# Altium PCB PCB1.PcbDoc (part 3 of 3)
Units mm, origin at the board's own origin, x right, y up, seen from the top; angles counter-clockwise.
Board outline 100.25 x 100.25 mm, 2 copper layers (Top Layer, Bottom Layer); 97 components, 80 nets, 311 pads, 309 vias.
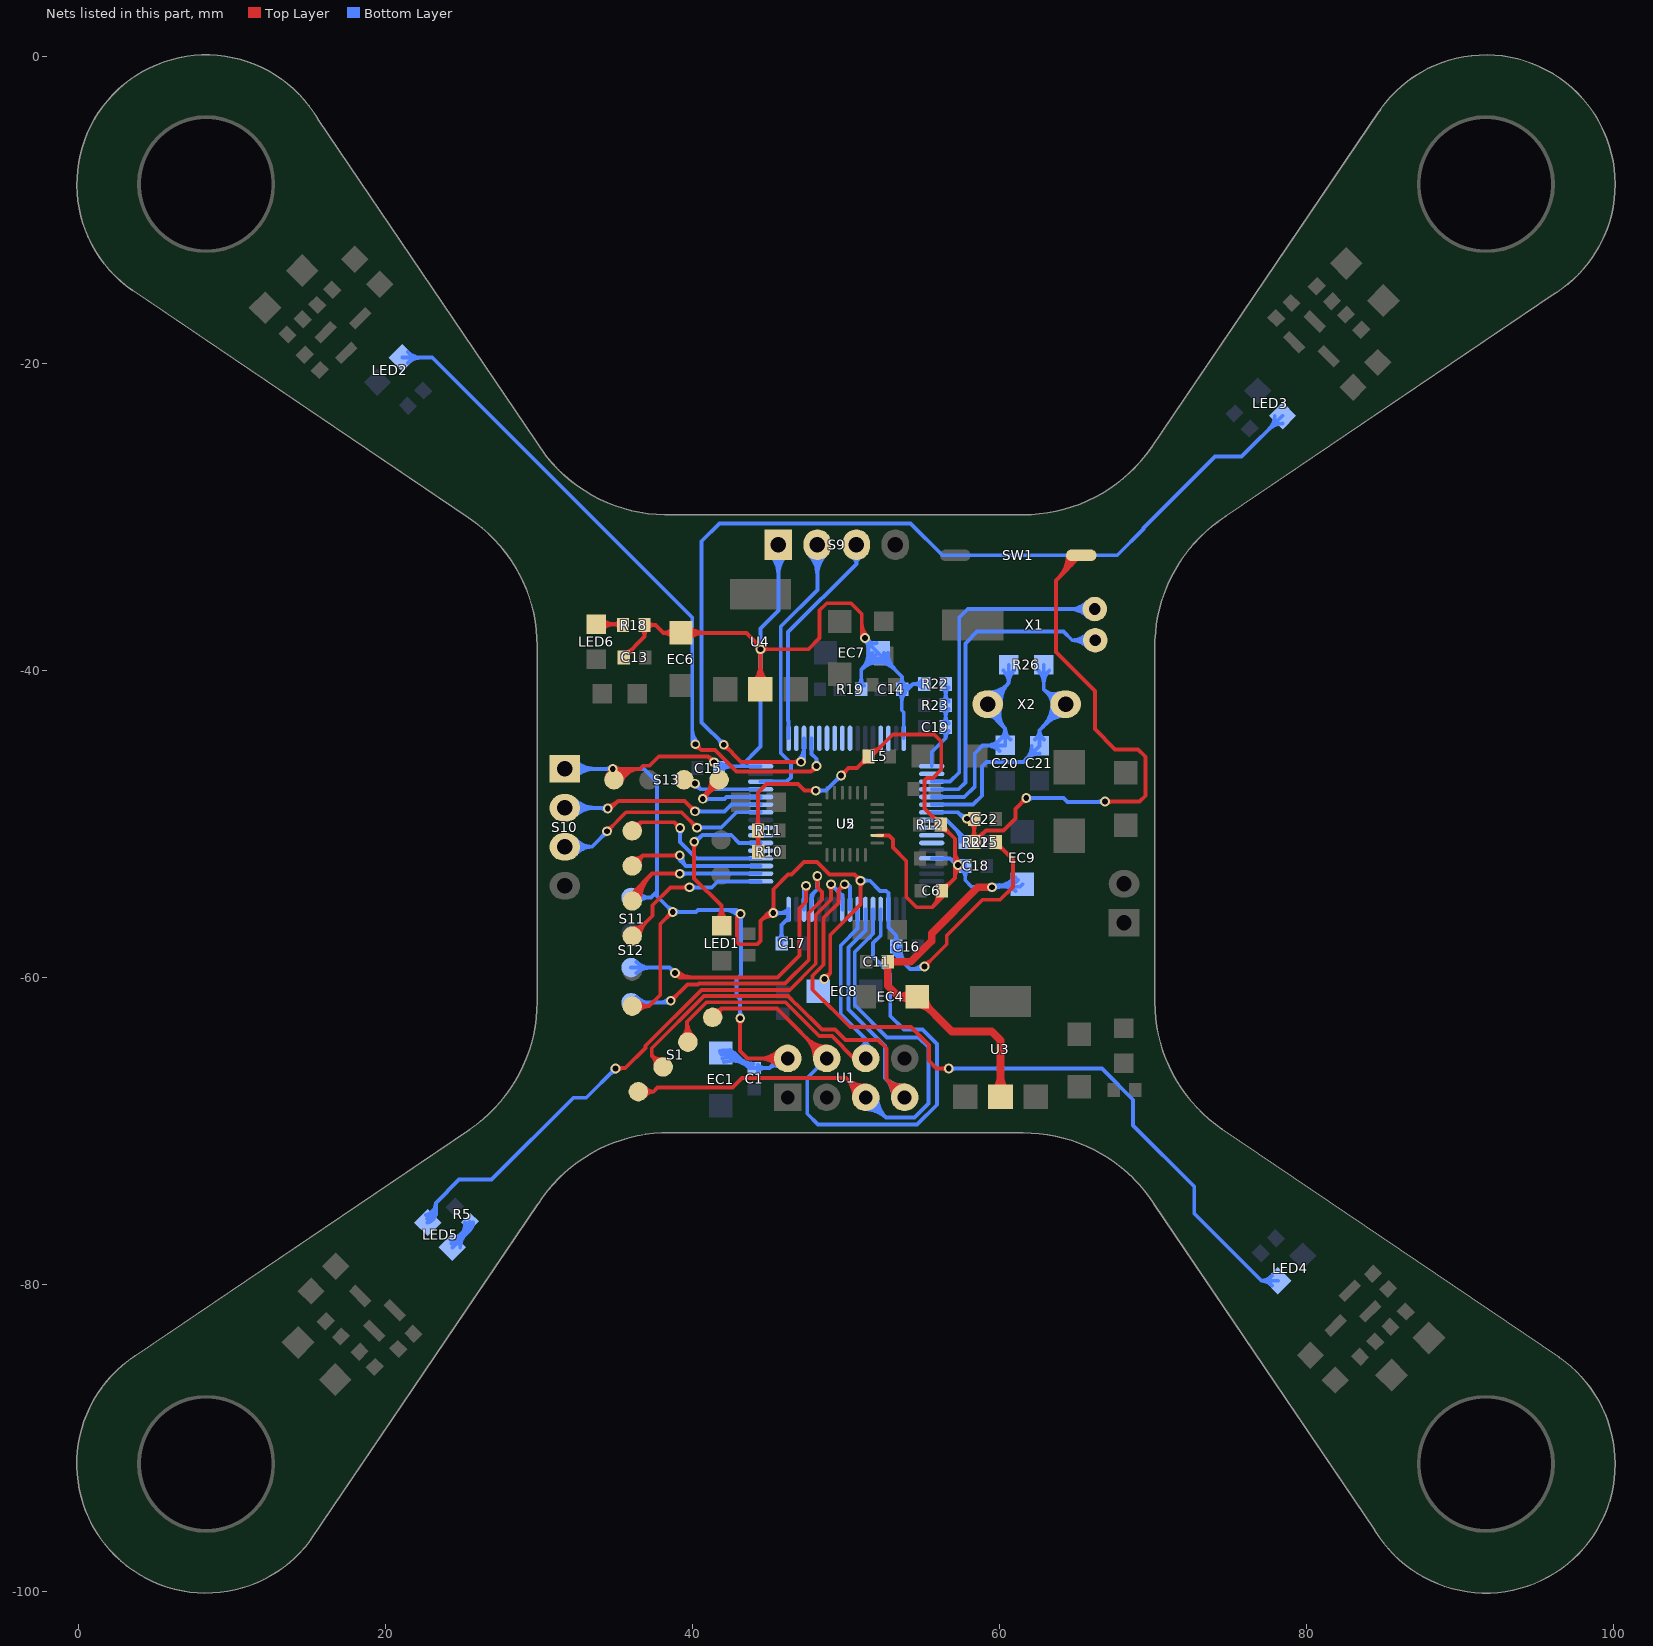
[diagram p3: the nets of this part, all layers, seen from the top]

## Via types
v1: diameter 0.635, hole 0.381, Top Layer to Bottom Layer, 309 vias

## Nets (pads, with @x,y where several pads share a name; then routed paths per layer and width w, separated by ;. In a path a pad name is that pad's centre, name@x,y a point inside that pad or via, vN(x,y) a via of type N, cw(c..) or ccw(c..) an arc to the next point about the centre after c; other vN are vias at no path point) (continued)
NetLED5_2: LED5.2 R5.1 | length 9.7
  Bottom Layer w0.254: LED5.2@24.229,-77.097 ccw(c23.887,-75.686) 25.145,-76.412 ; LED5.2@24.289,-77.344 ccw(c24.08,-76.481) 24.848,-76.925 ; LED5.2@24.348,-77.591 R5.1@25.489,-76.45 ; LED5.2@24.348,-77.083 ccw(c24.348,-75.856) 25.216,-76.724 ccw(c26.083,-77.591) LED5.2@24.856,-77.591 ; LED5.2@24.622,-77.317 ccw(c23.273,-75.968) R5.1@25.181,-75.968 ; LED5.2@24.839,-77.459 cw(c25.693,-77.23) 24.927,-76.788 ; 25.056,-76.884 ccw(c24.14,-75.968) R5.1@25.435,-75.968 ; R5.1@25.489,-75.933 R5.1@25.489,-76.45 ; R5.1@25.689,-75.968 cw(c25.007,-75.968) R5.1@25.489,-76.45
NetLED6_1: LED6.1 R18.2 | length 4.7
  Top Layer w0.254: LED6.1@33.708,-36.983 35.421,-36.983 R18.2@35.472,-37.033 ; LED6.1@34.067,-37.342 cw(c34.934,-38.209) 34.934,-36.983 cw(c34.934,-35.756) LED6.1@34.067,-36.623 ; 34.811,-36.983 cw(c34.811,-37.644) R18.2@35.279,-37.176 ; 34.814,-36.983 ccw(c34.814,-36.326) R18.2@35.279,-36.79
PA04: S1.1 U1.4 U5.20 | length 43.6
  Top Layer w0.254: S1.1@41.312,-62.599 41.885,-62.027 ; S1.1@41.479,-62.12 ccw(c41.608,-61.75) 41.885,-62.027 ; S1.1@41.792,-62.432 cw(c42.161,-62.303) 41.885,-62.027 ; U1.4@47.97,-65.278 ccw(c46.103,-65.278) 47.423,-63.958 ccw(c48.743,-62.639) U1.4@48.743,-64.505 ; U1.4@48.224,-65.278 ccw(c46.971,-65.278) 47.857,-64.392 ccw(c48.743,-63.506) U1.4@48.743,-64.759 ; U1.4@48.743,-65.278 45.491,-62.027 41.885,-62.027
  Bottom Layer w0.254: U1.4@48.743,-65.278 47.473,-66.548 47.473,-68.885 48.181,-69.594 54.638,-69.594 55.931,-68.301 55.931,-64.338 54.991,-63.398 53.772,-63.398 52.883,-62.509 52.883,-59.766 51.765,-58.649 51.765,-57.76 52.263,-57.262 U5.20@52.263,-55.562
PA05: S1.4 U1.5 U5.21 | length 48
  Top Layer w0.254: S1.4@36.463,-67.449 37.453,-67.449 ; S1.4@36.875,-67.745 cw(c37.453,-68.16) 37.453,-67.449 ; S1.4@36.875,-67.152 ccw(c37.453,-66.737) 37.453,-67.449 ; U1.5@50.51,-67.797 ccw(c48.811,-67.75) 50.013,-66.548 ; U1.5@50.764,-67.804 ccw(c49.623,-67.772) 50.43,-66.965 ccw(c51.237,-66.158) U1.5@51.268,-67.299 ; U1.5@51.261,-67.045 cw(c51.215,-65.346) 50.013,-66.548 ; U1.5@51.283,-67.818 50.013,-66.548 ; 37.453,-67.449 37.719,-67.183 42.596,-67.183 43.231,-66.548 50.013,-66.548
  Bottom Layer w0.254: U1.5@51.283,-68.591 cw(c51.283,-70.457) 52.602,-69.138 cw(c53.922,-67.818) U1.5@52.056,-67.818 ; U1.5@51.283,-68.337 cw(c51.283,-69.59) 52.169,-68.704 cw(c53.055,-67.818) U1.5@51.802,-67.818 ; U1.5@51.283,-67.818 52.603,-69.139 54.458,-69.139 55.372,-68.224 55.372,-64.541 54.737,-63.906 52.68,-63.906 50.571,-61.798 50.571,-58.344 51.763,-57.153 U5.21@51.763,-55.562
PA06: S1.3 U1.7 U5.22 | length 48.2
  Top Layer w0.254: S1.3@37.575,-65.773 ccw(c36.753,-65.676) 37.338,-65.091 ; S1.3@38.02,-65.328 cw(c37.923,-64.506) 37.338,-65.091 ; S1.3@38.079,-65.832 37.338,-65.091 ; U1.7@53.052,-67.761 ccw(c51.599,-67.655) 52.629,-66.624 ; U1.7@53.305,-67.78 ccw(c52.329,-67.708) 53.021,-67.017 ccw(c53.713,-66.325) U1.7@53.785,-67.3 ; U1.7@53.492,-67.818 U1.7@53.823,-67.818 52.629,-66.624 ; U1.7@53.766,-67.047 cw(c53.659,-65.594) 52.629,-66.624 ; 37.338,-65.091 37.338,-64.618 40.742,-61.214 46.219,-61.214 46.752,-61.747 46.787,-61.747 48.438,-63.398 49.285,-63.398 49.971,-64.084 52.095,-64.084 52.629,-64.618 52.629,-66.624
  Bottom Layer w0.254: U5.22@51.263,-55.562 51.263,-56.941 50.165,-58.039 50.165,-62.078 52.553,-64.465 52.553,-66.548 ; U1.7@53.05,-67.797 ccw(c51.351,-67.75) 52.553,-66.548 ; U1.7@53.304,-67.804 ccw(c52.163,-67.772) 52.97,-66.965 ccw(c53.777,-66.158) U1.7@53.808,-67.299 ; U1.7@53.801,-67.045 cw(c53.755,-65.346) 52.553,-66.548 ; U1.7@53.823,-67.818 52.553,-66.548
PA07: S1.2 U1.6 U5.23 | length 29.8
  Top Layer w0.254: S1.2@39.336,-63.857 ccw(c38.592,-63.112) 39.645,-63.112 ; 39.645,-63.49 ccw(c40.406,-63.49) S1.2@39.873,-64.034 ; 39.645,-62.886 ccw(c40.999,-62.886) S1.2@40.051,-63.853 ; S1.2@39.696,-64.216 39.645,-64.165 39.645,-62.886 40.91,-61.62 46.05,-61.62 48.255,-63.825 49.078,-63.825 50.53,-65.278 U1.6@51.283,-65.278
  Bottom Layer w0.254: U5.23@50.763,-55.562 50.763,-56.806 49.657,-57.912 49.657,-62.382 51.283,-64.008 ; U1.6@50.928,-64.591 ccw(c50.626,-64.008) 51.283,-64.008 ; U1.6@51.283,-65.278 51.283,-64.008 ; U1.6@51.638,-64.591 cw(c51.939,-64.008) 51.283,-64.008
PA09: S10.3 U5.42 | length 21.6
  Top Layer w0.254: v1(34.43,-50.47) 34.442,-50.47 35.675,-49.237 39.28,-49.237 v1(40.284,-50.241) ; v1@34.43,-50.279 ccw(c34.43,-49.789) 34.777,-50.136 ; v1@34.62,-50.47 cw(c35.049,-50.47) 34.746,-50.166 ; v1@40.094,-50.241 ccw(c39.634,-50.241) 39.959,-49.916 ccw(c40.284,-49.591) v1@40.284,-50.051
  Bottom Layer w0.254: S10.3@31.674,-51.486 33.452,-51.486 ; S10.3@32.168,-51.823 cw(c32.9,-52.449) 32.9,-51.486 cw(c32.9,-50.523) S10.3@32.168,-51.149 ; S10.3@32.361,-51.988 cw(c33.452,-52.92) 33.452,-51.486 ; S10.3@32.361,-50.983 ccw(c33.452,-50.051) 33.452,-51.486 ; 34.078,-50.86 ccw(c33.687,-50.47) v1@34.239,-50.47 ; 34.17,-50.768 cw(c34.43,-51.028) v1@34.43,-50.66 ; v1(34.43,-50.47) 34.43,-50.508 33.452,-51.486 ; v1(40.284,-50.241) 41.871,-50.241 42.875,-49.237 U5.42@44.438,-49.237 U5.42@44.426,-49.225 ; v1@40.419,-50.376 cw(c40.744,-50.701) 40.744,-50.241 cw(c40.744,-49.781) v1@40.419,-50.106
PA10: S10.2 U5.43 | length 21.2
  Top Layer w0.254: v1(34.468,-48.997) 34.646,-48.997 35.154,-48.489 39.472,-48.489 v1(40.157,-49.174) ; v1@34.468,-48.806 ccw(c34.468,-47.917) 35.097,-48.546 ; v1@39.967,-49.174 ccw(c39.507,-49.174) 39.832,-48.849 ccw(c40.157,-48.524) v1@40.157,-48.984
  Bottom Layer w0.254: S10.2@31.674,-48.946 34.417,-48.946 v1(34.468,-48.997) ; S10.2@32.141,-49.313 cw(c33.027,-50.199) 33.027,-48.946 cw(c33.027,-47.693) S10.2@32.141,-48.579 ; S10.2@32.32,-49.492 cw(c33.64,-50.812) 33.64,-48.946 cw(c33.64,-47.08) S10.2@32.32,-48.399 ; 33.885,-48.946 cw(c33.885,-49.579) v1@34.333,-49.131 ; 34.131,-48.946 ccw(c34.131,-48.659) v1@34.333,-48.862 ; v1(40.157,-49.174) 42.088,-49.174 42.525,-48.737 U5.43@44.438,-48.737 ; v1@40.292,-49.309 cw(c40.617,-49.634) 40.617,-49.174 cw(c40.617,-48.714) v1@40.292,-49.04
PA11: S13.1 U5.44 | length 10.4
  Top Layer w0.254: v1@40.616,-48.178 ccw(c40.473,-47.644) 40.951,-47.92 ; v1(40.665,-48.362) 41.732,-47.295 S13.1@41.732,-47.117 ; v1@40.665,-48.171 ccw(c40.665,-47.711) 40.991,-48.036 ccw(c41.316,-48.362) v1@40.856,-48.362 ; v1@40.739,-48.288 ccw(c39.569,-47.117) S13.1@41.224,-47.117 ; v1@40.849,-48.312 cw(c41.204,-48.217) 40.886,-48.033 ; 41.169,-47.858 cw(c41.732,-48.422) S13.1@41.732,-47.625 ; 41.173,-47.854 ccw(c40.436,-47.117) S13.1@41.478,-47.117
  Bottom Layer w0.254: v1(40.665,-48.362) 42.088,-48.362 42.212,-48.237 U5.44@44.438,-48.237 ; v1@40.8,-48.496 cw(c41.125,-48.822) 41.125,-48.362 cw(c41.125,-47.902) v1@40.8,-48.227
PA12: S13.2 U5.45 | length 5.2
  Bottom Layer w0.254: v1@40.157,-47.562 cw(c40.157,-48.021) 40.483,-47.696 cw(c40.808,-47.371) v1@40.348,-47.371 ; v1(40.157,-47.371) 40.524,-47.737 U5.45@44.438,-47.737
PA13: S9.2 U5.46 | length 23.6
  Bottom Layer w0.254: U5.46@44.438,-47.237 46.133,-47.237 46.406,-46.965 46.406,-46.082 46.368,-46.043 46.368,-45.987 45.745,-45.364 45.745,-37.135 48.133,-34.747 S9.2@48.133,-31.648 ; S9.2@47.586,-32.447 cw(c46.267,-33.767) 48.133,-33.767 cw(c49.999,-33.767) S9.2@48.68,-32.447 ; S9.2@47.766,-32.268 cw(c46.88,-33.154) 48.133,-33.154 cw(c49.386,-33.154) S9.2@48.5,-32.268
PA14: S9.3 U5.49 | length 15.7
  Bottom Layer w0.254: U5.49@46.263,-44.412 46.263,-43.299 46.22,-43.256 46.22,-37.498 50.673,-33.045 ; S9.3@50.384,-32.618 cw(c50.212,-33.045) 50.673,-33.045 ; S9.3@50.673,-31.648 50.673,-33.045 ; S9.3@50.962,-32.618 ccw(c51.134,-33.045) 50.673,-33.045
PA15: U5.50
PB03: U5.55
PB04: U5.56
PB05: U5.57
PB08: U5.61
PB09: U5.62
PB10: S12.1 U5.29 | length 26.5
  Top Layer w0.254: v1@38.506,-61.62 39.675,-60.452 40.354,-60.452 40.405,-60.401 46.025,-60.401 47.574,-58.852 47.574,-55.804 48.438,-54.94 48.438,-54.432 48.133,-54.127 v1(48.133,-53.391) ; v1@38.583,-61.328 ccw(c38.583,-60.807) 38.951,-61.176 ; v1@38.773,-61.519 cw(c39.172,-61.519) 38.89,-61.237 ; v1@47.998,-53.526 cw(c47.673,-53.851) 48.133,-53.851 cw(c48.593,-53.851) v1@48.268,-53.526
  Bottom Layer w0.254: S12.1@35.992,-61.646 38.456,-61.646 v1(38.583,-61.519) ; S12.1@36.351,-62.005 cw(c37.218,-62.872) 37.218,-61.646 cw(c37.218,-60.419) S12.1@36.351,-61.287 ; 37.816,-61.646 ccw(c37.816,-60.752) v1@38.448,-61.384 ; U5.29@47.763,-55.562 47.763,-54.625 48.133,-54.254 v1(48.133,-53.391) ; U5.29@47.786,-54.887 cw(c48.475,-54.887) 47.987,-54.4 ; v1@47.998,-53.526 cw(c47.673,-53.851) 48.133,-53.851 cw(c48.593,-53.851) v1@48.268,-53.526
PB11: S12.2 U5.30 | length 24.7
  Top Layer w0.254: v1@38.817,-59.76 ccw(c39.383,-59.194) 39.383,-59.995 ; v1(38.862,-59.715) 39.141,-59.995 ; v1@38.884,-59.905 cw(c38.919,-60.217) 39.141,-59.995 ; v1@38.997,-59.581 ccw(c39.996,-58.581) 39.996,-59.995 ; v1@39.051,-59.737 ccw(c39.364,-59.772) 39.141,-59.995 ; v1@47.262,-54.161 cw(c46.936,-54.486) 47.396,-54.486 cw(c47.856,-54.486) v1@47.531,-54.161 ; v1(47.396,-54.026) 47.396,-55.067 46.965,-55.499 46.965,-58.572 45.542,-59.995 39.141,-59.995
  Bottom Layer w0.254: S12.2@35.992,-59.36 38.506,-59.36 v1@38.887,-59.741 ; S12.2@36.351,-59.719 cw(c37.218,-60.586) 37.218,-59.36 cw(c37.218,-58.133) S12.2@36.351,-59.001 ; v1@38.672,-59.715 ccw(c38.212,-59.715) 38.537,-59.39 ccw(c38.862,-59.065) v1@38.862,-59.525 ; U5.30@47.263,-55.562 47.263,-54.16 v1(47.396,-54.026) v1@47.473,-53.95 ; U5.30@47.263,-54.809 cw(c48.179,-54.809) v1@47.531,-54.161
PB12: S11.4 U5.33 | length 13.6
  Top Layer w0.254: S11.4@36.068,-57.302 37.389,-55.982 37.389,-55.296 38.557,-54.127 v1(39.802,-54.127) ; S11.4@36.068,-56.794 ccw(c36.068,-55.568) 36.935,-56.435 ccw(c37.802,-57.302) S11.4@36.576,-57.302 ; v1@39.667,-54.262 ccw(c39.342,-54.587) 39.342,-54.127 ccw(c39.342,-53.667) v1@39.667,-53.993
  Bottom Layer w0.254: v1(39.802,-54.127) 41.25,-54.127 41.64,-53.737 U5.33@44.438,-53.737 ; v1@39.937,-54.262 cw(c40.262,-54.587) 40.262,-54.127 cw(c40.262,-53.667) v1@39.937,-53.993
PB13: S11.3 U5.34 | length 15
  Top Layer w0.254: S11.3@36.322,-55.016 cw(c38.1,-55.016) 36.843,-53.759 ; 36.409,-54.193 ccw(c37.233,-55.016) S11.3@36.068,-55.016 36.068,-54.534 37.363,-53.238 v1(39.167,-53.238) ; S11.3@36.576,-55.016 cw(c38.968,-55.016) 37.276,-53.325 ; v1@39.032,-53.373 ccw(c38.707,-53.698) 38.707,-53.238 ccw(c38.707,-52.778) v1@39.032,-53.104
  Bottom Layer w0.254: v1(39.167,-53.238) 39.928,-53.238 39.929,-53.237 U5.34@44.438,-53.237 ; v1@39.302,-53.373 cw(c39.627,-53.698) 39.627,-53.238 cw(c39.627,-52.778) v1@39.302,-53.104
PB14: S11.2 U5.35 | length 12.3
  Top Layer w0.254: S11.2@36.068,-52.73 36.754,-52.045 ; S11.2@36.159,-52.231 ccw(c36.279,-51.57) 36.754,-52.045 ; S11.2@36.568,-52.64 cw(c37.229,-52.52) 36.754,-52.045 ; v1@39.032,-52.179 ccw(c38.707,-52.505) 38.707,-52.045 ccw(c38.707,-51.585) v1@39.032,-51.91 ; v1(39.167,-52.045) 36.754,-52.045
  Bottom Layer w0.254: v1@39.104,-52.033 ccw(c39.506,-52.11) 39.217,-52.399 ; v1(39.167,-52.045) 39.167,-52.349 39.555,-52.737 ; v1@39.354,-52.081 ccw(c40.072,-52.22) 39.555,-52.737 ; U5.35@44.438,-52.737 39.555,-52.737
PB15: S11.1 U5.36 | length 12.4
  Top Layer w0.254: S11.1@36.068,-50.444 36.627,-49.886 ; S11.1@36.246,-49.968 ccw(c36.372,-49.631) 36.627,-49.886 ; S11.1@36.544,-50.267 cw(c36.882,-50.141) 36.627,-49.886 ; v1@39.002,-50.267 ccw(c38.542,-50.267) 38.867,-49.941 ccw(c39.192,-49.616) v1@39.192,-50.076 ; v1(39.192,-50.267) 38.811,-49.886 36.627,-49.886
  Bottom Layer w0.254: v1@39.057,-50.401 cw(c38.732,-50.727) 39.192,-50.727 cw(c39.652,-50.727) v1@39.327,-50.401 ; v1(39.192,-50.267) 39.192,-51.181 40.248,-52.237 U5.36@44.438,-52.237
PC00: R21.2 U5.8 | length 3.8
  Bottom Layer w0.254: U5.8@55.588,-49.737 56.544,-49.737 57.745,-50.938 R21.2@57.745,-51.181 ; 57.143,-50.336 cw(c56.348,-51.131) R21.2@57.472,-51.131
PC01: U5.9
PC02: U5.10
PC03: U5.11
PC04: LED4.1 U5.24 | length 54.6
  Top Layer w0.254: v1@49.721,-53.924 cw(c49.261,-53.924) 49.586,-54.249 cw(c49.911,-54.575) v1@49.911,-54.115 ; v1(49.911,-53.924) 49.505,-54.331 49.505,-55.143 48.539,-56.109 48.539,-59.176 47.822,-59.893 47.822,-60.802 49.022,-62.001 49.038,-62.001 50.279,-63.242 54.225,-63.242 55.397,-64.414 55.397,-65.43 55.905,-65.938 v1(56.693,-65.938) ; v1@56.558,-66.073 ccw(c56.233,-66.398) 56.233,-65.938 ccw(c56.233,-65.478) v1@56.558,-65.804
  Bottom Layer w0.254: v1@49.809,-53.95 49.936,-53.95 50.038,-53.848 50.263,-54.073 ; v1@50.038,-54.066 cw(c50.147,-54.188) 50.263,-54.073 ; U5.24@50.263,-55.562 50.263,-54.073 ; v1(56.693,-65.938) 66.675,-65.938 68.707,-67.97 68.707,-69.647 72.695,-73.635 72.695,-75.387 77.075,-79.767 ; v1@56.828,-66.073 cw(c57.153,-66.398) 57.153,-65.938 cw(c57.153,-65.478) v1@56.828,-65.804 ; LED4.1@77.758,-80.09 ccw(c77.075,-80.652) 77.075,-79.767 ; LED4.1@77.758,-79.444 cw(c77.075,-78.882) 77.075,-79.767 ; LED4.1@78.151,-79.767 77.075,-79.767
PC05: LED5.1 U5.25 | length 47
  Top Layer w0.254: v1@34.976,-65.913 35.611,-65.913 36.932,-64.592 36.932,-64.449 40.573,-60.808 46.333,-60.808 48.031,-59.109 48.031,-55.931 49.022,-54.94 v1(49.022,-53.924) ; v1@35.111,-66.073 cw(c35.497,-66.46) 35.497,-65.913 ; v1@35.111,-65.804 ccw(c35.374,-65.54) 35.374,-65.913 ; v1@48.887,-54.059 cw(c48.562,-54.384) 49.022,-54.384 cw(c49.482,-54.384) v1@49.157,-54.059
  Bottom Layer w0.254: LED5.1@22.632,-75.476 ccw(c22.476,-74.701) 23.266,-74.701 ; LED5.1@22.682,-75.725 ccw(c22.538,-75.012) 23.266,-75.012 ; 23.266,-75.322 cw(c22.601,-75.322) LED5.1@22.732,-75.974 23.266,-75.44 23.266,-74.701 ; v1@34.785,-65.938 cw(c34.325,-65.938) 34.651,-66.264 cw(c34.976,-66.589) v1@34.976,-66.129 ; v1(34.976,-65.938) 33.071,-67.843 32.233,-67.843 26.899,-73.177 24.79,-73.177 23.266,-74.701 ; v1@49.022,-54.115 cw(c49.022,-54.575) 49.347,-54.249 cw(c49.672,-53.924) v1@49.212,-53.924 ; v1(49.022,-53.924) 49.718,-54.62 ; 49.566,-54.468 cw(c49.147,-54.887) U5.25@49.74,-54.887 ; U5.25@49.743,-54.875 ccw(c49.575,-54.763) 49.718,-54.62 ; U5.25@49.763,-55.562 49.763,-54.62 49.718,-54.62
PC06: U5.37
PC07: LED1.1 U5.38 | length 14.2
  Top Layer w0.254: v1@39.972,-51.29 cw(c39.647,-51.616) 40.107,-51.616 cw(c40.567,-51.616) v1@40.241,-51.29 ; v1(40.107,-51.156) 40.107,-53.543 41.887,-55.323 LED1.1@41.887,-56.641 ; LED1.1@41.527,-56.282 ccw(c40.66,-55.415) 41.887,-55.415 ccw(c43.113,-55.415) LED1.1@42.246,-56.282
  Bottom Layer w0.254: v1(40.107,-51.156) 40.214,-51.156 40.646,-50.724 42.52,-50.724 43.033,-51.237 U5.38@44.438,-51.237 ; v1@40.107,-50.965 ccw(c40.107,-50.246) 40.615,-50.754
PC08: U5.39
PC09: U5.40
PC10: LED3.1 U5.51 | length 69.4
  Top Layer w0.254: v1@42.037,-45.022 cw(c42.037,-45.481) 42.362,-45.156 cw(c42.687,-44.831) v1@42.227,-44.831 ; v1(42.037,-44.831) 43.155,-45.949 v1(47.066,-45.949) ; v1@46.931,-46.083 ccw(c46.606,-46.409) 46.606,-45.949 ccw(c46.606,-45.489) v1@46.931,-45.814
  Bottom Layer w0.254: v1@41.846,-44.831 ccw(c41.387,-44.831) 41.712,-44.506 ccw(c42.037,-44.181) v1@42.037,-44.64 ; v1(42.037,-44.831) 40.589,-43.383 40.589,-31.572 41.758,-30.404 54.204,-30.404 56.286,-32.487 67.682,-32.487 69.393,-30.775 69.393,-30.709 74.041,-26.06 75.786,-26.06 LED3.1@78.452,-23.395 ; v1@46.931,-45.814 ccw(c46.132,-45.015) U5.51@47.263,-45.015 ; v1(47.066,-45.949) 47.263,-45.752 U5.51@47.263,-44.412 ; v1@47.111,-45.994 ccw(c46.745,-45.628) 47.263,-45.628 ; LED3.1@77.944,-23.395 cw(c76.718,-23.395) 77.585,-24.262 cw(c78.452,-25.129) LED3.1@78.452,-23.903
PC11: LED2.1 U5.52 | length 50.4
  Top Layer w0.254: v1@40.183,-44.996 cw(c40.183,-45.456) 40.508,-45.131 cw(c40.833,-44.806) v1@40.373,-44.806 ; v1(40.183,-44.806) 40.564,-45.187 41.459,-45.187 42.856,-46.584 47.727,-46.584 v1(48.082,-46.228) ; v1@47.892,-46.228 cw(c47.432,-46.228) 47.757,-46.553 cw(c48.082,-46.878) v1@48.082,-46.419
  Bottom Layer w0.254: LED2.1@21.078,-19.604 23.033,-19.604 39.98,-36.551 39.98,-44.602 v1(40.183,-44.806) ; LED2.1@21.438,-19.963 cw(c22.305,-20.83) 22.305,-19.604 cw(c22.305,-18.377) LED2.1@21.438,-19.245 ; 39.98,-44.468 ccw(c40.52,-44.468) v1@40.138,-44.851 ; 39.98,-43.855 ccw(c41.133,-43.855) v1@40.318,-44.671 ; U5.52@47.763,-44.412 47.763,-45.426 48.082,-45.745 v1(48.082,-46.228) ; v1@47.947,-46.093 ccw(c47.622,-45.768) 48.082,-45.768 ccw(c48.542,-45.768) v1@48.217,-46.093
PC12: U5.53
PC13: U5.2
PC14: U5.3 X1.2 | length 25.3
  Bottom Layer w0.254: U5.3@55.588,-47.237 56.776,-47.237 57.379,-46.634 57.379,-36.551 57.937,-35.992 X1.2@66.218,-35.992 ; X1.2@65.742,-36.468 ccw(c64.593,-37.617) 64.593,-35.992 ccw(c64.593,-34.367) X1.2@65.742,-35.516 ; X1.2@65.922,-36.288 ccw(c65.206,-37.003) 65.206,-35.992 ccw(c65.206,-34.98) X1.2@65.922,-35.696
PC15: U5.4 X1.1 | length 24.1
  Bottom Layer w0.254: U5.4@55.588,-47.737 57.343,-47.737 57.785,-47.295 57.785,-38.227 58.547,-37.465 64.186,-37.465 64.745,-38.024 ; X1.1@65.74,-38.471 ccw(c64.745,-39.356) 64.745,-38.024 ; X1.1@65.74,-37.577 cw(c64.745,-36.692) 64.745,-38.024 ; X1.1@65.93,-38.302 ccw(c65.31,-38.853) 65.31,-38.024 ccw(c65.31,-37.195) X1.1@65.93,-37.745 ; X1.1@66.243,-38.024 64.745,-38.024
PD00: C20.2 R26.2 U5.5 X2.2 | length 27.8
  Bottom Layer w0.254: U5.5@55.588,-48.237 57.706,-48.237 58.395,-47.549 58.395,-45.39 58.903,-44.882 C20.2@60.376,-44.882 60.376,-43.764 ; X2.2@59.333,-42.962 cw(c59.333,-43.545) 59.745,-43.133 ; X2.2@59.333,-41.67 ccw(c59.333,-40.659) 60.048,-41.374 ; X2.2@59.333,-41.416 ccw(c59.333,-39.792) 60.482,-40.941 ; X2.2@59.584,-42.274 ccw(c60.425,-42.558) 59.797,-43.185 ; X2.2@59.825,-42.355 ccw(c60.857,-42.704) 60.086,-43.475 ; X2.2@59.851,-42.157 cw(c61.071,-42.08) 60.206,-41.216 ; C20.2@60.017,-45.241 ccw(c59.149,-46.108) 59.149,-44.882 ccw(c59.149,-43.655) C20.2@60.017,-44.523 ; C20.2@60.042,-44.499 ccw(c59.401,-43.764) 60.376,-43.764 ; X2.2@60.065,-42.437 ccw(c61.29,-42.85) 60.376,-43.764 ; X2.2@60.104,-42.141 cw(c61.82,-42.033) 60.604,-40.818 ; R26.2@60.252,-39.99 cw(c59.456,-40.818) 60.604,-40.818 ; R26.2@60.604,-39.624 60.604,-40.818 ; C20.2@60.71,-44.499 cw(c61.351,-43.764) 60.376,-43.764 ; R26.2@60.957,-39.99 ccw(c61.753,-40.818) 60.604,-40.818 ; 60.376,-43.764 59.233,-42.621 X2.2@59.233,-42.189 60.604,-40.818
PD01: C21.2 R26.1 U5.6 X2.1 | length 29.6
  Bottom Layer w0.254: U5.6@55.588,-48.737 58.273,-48.737 58.852,-48.158 58.852,-46.253 59.157,-45.949 61.57,-45.949 C21.2@62.611,-44.907 62.611,-43.891 ; C21.2@62.103,-44.907 cw(c60.877,-44.907) 61.744,-45.774 cw(c62.611,-46.642) C21.2@62.611,-45.415 ; C21.2@62.306,-44.501 ccw(c61.849,-43.891) 62.611,-43.891 ; R26.1@62.531,-39.983 cw(c61.664,-40.85) 62.89,-40.85 cw(c64.117,-40.85) R26.1@63.25,-39.983 ; 62.822,-43.68 ccw(c61.332,-42.189) 63.44,-42.189 ccw(c62.436,-42.189) 63.146,-41.48 ; R26.1@62.89,-39.624 62.89,-41.224 ; C21.2@62.916,-44.501 cw(c63.373,-43.891) 62.611,-43.891 ; 63.064,-43.438 cw(c64.213,-44.587) X2.1@64.213,-42.962 ; 63.174,-41.508 ccw(c63.758,-40.923) X2.1@64.037,-41.701 ; 63.256,-43.246 ccw(c62.199,-42.189) X2.1@63.694,-42.189 ; 63.498,-43.005 cw(c64.213,-43.72) X2.1@64.213,-42.708 ; X2.1@63.952,-41.462 cw(c63.608,-40.506) 62.89,-41.224 ; 62.611,-43.891 X2.1@64.313,-42.189 63.856,-42.189 62.89,-41.224
PD02: U5.54
RESETN: C22.1 R25.1 SW1.1 U5.7 | length 48
  Top Layer w0.254: v1@57.837,-49.841 cw(c57.626,-50.629) 58.333,-50.221 ; v1@57.916,-49.845 cw(c57.957,-50.113) C22.1@58.192,-49.978 ; R25.1@58.162,-50.938 ccw(c57.696,-50.472) 58.355,-50.472 ccw(c59.014,-50.472) R25.1@58.548,-50.938 ; C22.1@58.162,-49.925 cw(c57.696,-50.391) 58.355,-50.391 cw(c59.014,-50.391) C22.1@58.548,-49.925 ; R25.1@58.355,-50.858 ccw(c58.355,-50.078) 58.906,-50.63 ; C22.1@58.355,-49.682 R25.1@58.355,-51.181 59.124,-50.412 60.271,-50.412 61.036,-49.646 61.036,-49.022 v1(61.747,-48.311) ; R25.1@58.628,-51.131 cw(c59.166,-51.131) 58.786,-50.75 ; v1@61.557,-48.311 cw(c61.097,-48.311) 61.422,-48.636 cw(c61.747,-48.961) v1@61.747,-48.501 ; 63.838,-33.977 ccw(c62.348,-32.487) SW1.1@64.456,-32.487 ; 64.272,-33.543 ccw(c63.215,-32.487) SW1.1@64.71,-32.487 ; 64.706,-33.11 ccw(c64.083,-32.487) SW1.1@64.964,-32.487 ; SW1.1@65.139,-32.676 ccw(c64.95,-32.487) SW1.1@65.218,-32.487 ; SW1.1@65.329,-32.487 63.678,-34.138 63.678,-38.786 66.218,-41.326 66.218,-43.815 67.539,-45.136 69.037,-45.136 69.52,-45.618 69.52,-48.158 69.139,-48.539 v1(66.878,-48.539) ; v1@67.013,-48.674 cw(c67.338,-48.999) 67.338,-48.539 cw(c67.338,-48.079) v1@67.013,-48.405
  Bottom Layer w0.254: U5.7@55.588,-49.237 57.264,-49.237 ; v1@57.874,-49.467 cw(c57.822,-48.679) 57.264,-49.237 ; v1(57.887,-49.657) 57.683,-49.657 57.264,-49.237 ; v1(61.747,-48.311) 64.186,-48.311 64.44,-48.565 66.853,-48.565 v1(66.878,-48.539) ; v1@61.882,-48.446 cw(c62.207,-48.771) 62.207,-48.311 cw(c62.207,-47.851) v1@61.882,-48.176 ; 66.357,-48.565 ccw(c66.357,-48.018) v1@66.743,-48.405 ; 66.48,-48.565 cw(c66.48,-48.938) v1@66.743,-48.674
VBAT: C19.2 R22.1 R23.2 U5.1 | length 10.9
  Bottom Layer w0.254: U5.1@55.588,-46.237 55.588,-45.301 56.504,-44.385 ; C19.2@56.311,-43.445 ccw(c55.845,-42.979) 56.504,-42.979 ccw(c57.163,-42.979) C19.2@56.697,-43.445 ; R23.2@56.311,-42.509 cw(c55.845,-42.975) 56.504,-42.975 cw(c57.163,-42.975) R23.2@56.697,-42.509 ; R23.2@56.311,-42.023 ccw(c55.845,-41.557) 56.504,-41.557 ccw(c57.163,-41.557) R23.2@56.697,-42.023 ; R22.1@56.311,-41.112 cw(c55.845,-41.578) 56.504,-41.578 cw(c57.163,-41.578) R22.1@56.697,-41.112 ; C19.2@56.313,-43.934 cw(c55.874,-44.385) 56.504,-44.385 ; R22.1@56.504,-40.869 C19.2@56.504,-43.688 56.504,-44.385 ; C19.2@56.694,-43.934 ccw(c57.134,-44.385) 56.504,-44.385
VCCA: C6.1 C11.1 C18.2 EC4.1 EC9.1 L5.2 R10.2 R11.2 R12.2 U2.8 U3.2 U5.13 | length 102.2
  Top Layer w0.254: R11.2@44.065,-50.662 cw(c43.538,-51.189) 44.283,-51.189 ; R11.2@44.065,-50.176 ccw(c43.599,-49.71) 44.258,-49.71 ccw(c44.917,-49.71) R11.2@44.451,-50.176 ; R10.2@44.09,-51.573 ccw(c43.624,-51.107) 44.283,-51.107 ccw(c44.942,-51.107) R10.2@44.476,-51.573 ; R10.2@44.283,-51.816 44.283,-50.444 R11.2@44.258,-50.419 44.258,-47.955 44.817,-47.396 46.863,-47.396 47.295,-47.828 v1(48.031,-47.828) ; 44.283,-51.067 cw(c44.856,-51.067) R11.2@44.451,-50.662 ; v1@47.897,-47.963 ccw(c47.571,-48.288) 47.571,-47.828 ccw(c47.571,-47.368) v1@47.897,-47.693 ; v1(49.682,-46.838) 50.165,-46.355 50.71,-46.355 L5.2@51.472,-45.593 51.626,-45.593 53.049,-44.171 55.753,-44.171 56.21,-44.628 56.21,-46.457 55.67,-46.997 55.277,-46.997 55.113,-47.161 55.113,-48.978 R12.2@56.174,-50.038 57.099,-50.964 57.099,-53.507 C6.1@56.25,-54.356 56.25,-54.799 55.626,-55.423 ; v1@49.682,-46.647 ccw(c49.682,-46.187) 50.008,-46.512 ccw(c50.333,-46.838) v1@49.873,-46.838 ; 50.92,-46.144 cw(c51.472,-46.696) L5.2@51.472,-45.916 ; 51.041,-46.024 ccw(c50.66,-45.643) L5.2@51.199,-45.643 ; L5.2@51.472,-45.524 ccw(c51.472,-44.984) L5.2@51.854,-45.366 ; L5.2@51.472,-45.27 ccw(c51.472,-44.116) 52.287,-44.932 ; U2.8@52.038,-50.737 52.795,-50.737 53.061,-51.003 53.061,-51.537 53.924,-52.4 53.924,-54.762 54.585,-55.423 55.626,-55.423 ; 55.622,-49.487 ccw(c56.174,-48.935) R12.2@56.174,-49.715 ; 55.743,-49.607 cw(c55.362,-49.988) R12.2@55.901,-49.988 ; C6.1@55.978,-54.434 cw(c54.761,-54.557) 55.626,-55.423 ; 56.004,-55.045 ccw(c55.447,-54.488) C6.1@56.231,-54.408 ; R12.2@56.174,-50.361 cw(c56.174,-51.141) 56.725,-50.589 ; C6.1@56.25,-54.033 ccw(c56.25,-53.253) 56.801,-53.805 ; R12.2@56.447,-50.088 ccw(c56.985,-50.088) 56.604,-50.469 ; C6.1@56.523,-54.306 cw(c57.061,-54.306) 56.68,-53.925 ; 57.099,-53.531 cw(c58.026,-53.531) v1@57.426,-52.825 ; 57.099,-52.982 cw(c57.559,-52.982) v1@57.261,-52.631 ; 57.099,-52.342 ccw(c57.64,-52.342) v1@57.257,-52.725 ; 57.099,-51.729 ccw(c58.253,-51.729) v1@57.437,-52.545
  Top Layer w0.5: EC4.1@54.264,-61.618 ccw(c53.442,-62.4) 53.442,-61.265 ; EC4.1@54.264,-60.912 cw(c53.442,-60.129) 53.442,-61.265 ; EC4.1@54.635,-61.777 cw(c54.635,-63.013) 55.509,-62.139 cw(c56.383,-61.265) EC4.1@55.147,-61.265 ; v1(59.512,-54.127) 58.598,-54.127 55.588,-57.137 55.588,-57.62 54.229,-58.979 C11.1@52.719,-58.979 52.719,-60.542 53.442,-61.265 ; U3.2@59.68,-67.38 ccw(c58.741,-66.442) 60.069,-66.442 ccw(c61.397,-66.442) U3.2@60.458,-67.38 ; U3.2@60.069,-67.769 60.069,-64.108 59.487,-63.525 56.896,-63.525 EC4.1@54.635,-61.265 53.442,-61.265
  Bottom Layer w0.254: v1(48.031,-47.828) 48.692,-47.828 v1(49.682,-46.838) ; v1@48.166,-47.963 cw(c48.491,-48.288) 48.491,-47.828 cw(c48.491,-47.368) v1@48.166,-47.693 ; v1@49.492,-46.838 cw(c49.032,-46.838) 49.357,-47.163 cw(c49.682,-47.488) v1@49.682,-47.028 ; U5.13@55.588,-52.237 56.784,-52.237 ; 56.847,-52.301 ccw(c57.302,-51.845) v1@57.302,-52.489 ; 57.031,-52.484 cw(c56.836,-52.68) v1@57.112,-52.68 ; v1@57.06,-52.513 ccw(c57.527,-52.047) C18.2@57.764,-52.663 ; v1@57.252,-52.641 cw(c57.676,-52.962) C18.2@57.603,-52.435 ; v1@57.253,-52.864 cw(c57.053,-53.61) 57.722,-53.224 ; v1@57.336,-52.79 ccw(c57.68,-52.446) C18.2@57.855,-52.9 ; C18.2@57.437,-52.814 cw(c57.64,-53.017) C18.2@57.64,-52.73 ; C18.2@57.458,-52.569 ccw(c57.771,-52.346) C18.2@57.771,-52.73 ; C18.2@57.54,-52.876 ccw(c57.277,-53.04) v1@57.277,-52.73 ; C18.2@57.54,-52.585 cw(c57.277,-52.42) v1@57.277,-52.73 ; C18.2@57.578,-52.973 cw(c57.112,-53.439) 57.771,-53.439 cw(c58.43,-53.439) C18.2@57.964,-52.973 ; C18.2@57.673,-52.426 cw(c57.373,-51.648) 56.784,-52.237 ; 58.957,-54.088 cw(c58.957,-54.683) v1@59.377,-54.262 ; 59.148,-54.088 ccw(c59.148,-53.763) v1@59.377,-53.993 ; v1@59.565,-54.088 ccw(c59.565,-51.996) EC9.1@61.044,-53.475 ; v1@59.61,-53.964 ccw(c59.801,-53.643) 59.893,-54.005 ; v1@59.647,-54.262 cw(c60.068,-54.683) 60.068,-54.088 ; v1@59.647,-53.993 ccw(c59.877,-53.763) 59.877,-54.088 ; v1@59.676,-54.225 cw(c60.145,-54.505) 60.011,-53.975 ; 60.179,-54.088 ccw(c60.179,-52.609) EC9.1@61.224,-53.655 ; 60.355,-54.088 cw(c60.355,-55.062) EC9.1@61.044,-54.373 ; EC9.1@61.493,-53.924 61.33,-54.088 58.191,-54.088 57.771,-53.667 C18.2@57.771,-52.73 ; 56.784,-52.237 v1@57.277,-52.73 ; v1@57.277,-52.73 C18.2@57.771,-52.73
  other v1: 57.302,-52.68
VCCD: C1.2 C13.1 C14.2 C15.2 C16.2 C17.2 EC1.1 EC6.1 EC7.1 EC8.1 R18.1 R19.2 R22.2 R25.2 S9.1 S10.1 S11.6 S12.4 S13.4 U1.2 U4.2 U5.19 U5.32 U5.48 U5.64 | length 253.5
  Top Layer w0.254: S13.4@34.393,-46.953 cw(c35.158,-47.214) 35.158,-46.406 ; S13.4@34.461,-46.874 ccw(c33.987,-46.47) v1@34.608,-46.421 ; S13.4@34.611,-46.699 cw(c34.836,-46.892) S13.4@34.813,-46.596 ; S13.4@34.634,-47.035 cw(c35.513,-47.335) 35.513,-46.406 ; S13.4@34.656,-46.533 cw(c34.396,-46.767) S13.4@34.679,-46.972 ; v1(34.798,-46.406) 36.578,-46.406 ; v1@34.845,-46.363 cw(c34.635,-46.552) S13.4@34.864,-46.717 ; S13.4@34.874,-47.117 cw(c35.868,-47.456) 35.868,-46.406 ; S13.4@34.933,-46.541 cw(c35.258,-46.866) 35.258,-46.406 cw(c35.258,-45.946) v1@34.933,-46.271 ; S13.4@35.115,-47.199 cw(c36.223,-47.577) 36.223,-46.406 ; S13.4@35.355,-47.281 cw(c36.578,-47.698) 36.578,-46.406 ; C13.1@35.522,-39.142 36.872,-37.792 R18.1@36.872,-37.033 37.592,-37.033 38.1,-37.541 ; C13.1@35.522,-38.819 ccw(c35.522,-38.039) 36.074,-38.59 ; C13.1@35.795,-39.092 cw(c36.334,-39.092) 35.953,-38.711 ; S11.6@36.068,-61.874 37.16,-61.874 ; S11.6@36.457,-62.202 cw(c37.16,-62.794) 37.16,-61.874 ; S11.6@36.457,-61.547 ccw(c37.16,-60.954) 37.16,-61.874 ; R18.1@36.679,-37.276 cw(c36.213,-37.742) 36.872,-37.742 cw(c37.531,-37.742) R18.1@37.065,-37.276 ; R18.1@37.065,-37.226 cw(c37.531,-37.692) 37.531,-37.033 cw(c37.531,-36.374) R18.1@37.065,-36.84 ; 38.341,-56.071 cw(c38.71,-56.439) v1@38.71,-55.918 ; 38.402,-56.009 ccw(c38.121,-55.728) v1@38.519,-55.728 ; v1@38.684,-55.728 37.897,-56.515 37.897,-61.138 37.16,-61.874 ; EC6.1@38.706,-37.878 ccw(c38.1,-38.256) 38.1,-37.541 ; EC6.1@38.706,-37.205 cw(c38.1,-36.827) 38.1,-37.541 ; EC6.1@39.514,-37.811 cw(c40.165,-38.461) 40.165,-37.541 cw(c40.165,-36.622) EC6.1@39.514,-37.272 ; EC6.1@39.694,-37.99 cw(c40.778,-39.074) 40.778,-37.541 cw(c40.778,-36.008) EC6.1@39.694,-37.092 ; v1@41.212,-45.974 ccw(c40.752,-45.974) 41.077,-45.649 ccw(c41.402,-45.324) v1@41.402,-45.783 ; v1(41.402,-45.974) 41.021,-45.593 37.795,-45.593 37.186,-46.203 36.781,-46.203 36.578,-46.406 ; v1@42.969,-62.797 cw(c42.644,-63.122) 43.104,-63.122 cw(c43.564,-63.122) v1@43.239,-62.797 ; v1(43.104,-62.662) 43.104,-64.795 43.586,-65.278 U1.2@46.203,-65.278 ; v1(43.129,-55.855) 42.908,-56.076 42.908,-57.677 43.071,-57.841 44.203,-57.841 44.425,-57.619 44.425,-56.312 ; U4.2@43.949,-40.751 ccw(c42.8,-39.602) 44.425,-39.602 ccw(c46.049,-39.602) U4.2@44.9,-40.751 ; 43.992,-38.023 cw(c43.406,-38.608) v1@44.234,-38.608 ; U4.2@44.128,-40.93 ccw(c43.413,-40.215) 44.425,-40.215 ccw(c45.436,-40.215) U4.2@44.721,-40.93 ; v1@44.29,-38.743 cw(c43.965,-39.068) 44.425,-39.068 cw(c44.885,-39.068) 44.559,-38.743 cw(c44.885,-39.068) 44.885,-38.608 cw(c44.885,-38.148) v1@44.559,-38.473 ; U4.2@44.425,-41.227 44.425,-38.456 43.51,-37.541 EC6.1@39.245,-37.541 38.1,-37.541 ; v1(44.425,-38.608) 47.549,-38.608 48.285,-37.871 48.285,-36.068 48.743,-35.611 50.317,-35.611 51.029,-36.322 51.029,-37.795 51.232,-37.998 v1(51.232,-37.871) ; 44.828,-55.909 cw(c45.236,-56.316) v1@45.266,-55.74 ; v1@45.098,-55.899 ccw(c44.933,-55.995) 44.933,-55.804 ; v1@45.098,-55.708 cw(c44.933,-55.613) 44.933,-55.804 ; v1@45.128,-55.669 ccw(c44.803,-55.344) 45.263,-55.344 ccw(c45.723,-55.344) v1@45.398,-55.669 ; v1@45.253,-55.994 ccw(c45.195,-57.082) 44.425,-56.312 ; U1.2@45.656,-65.825 ccw(c44.336,-67.144) 44.336,-65.278 ccw(c44.336,-63.412) U1.2@45.656,-64.731 ; U1.2@45.836,-65.645 ccw(c44.95,-66.531) 44.95,-65.278 ccw(c44.95,-64.025) U1.2@45.836,-64.911 ; v1(48.59,-60.096) 48.971,-59.715 48.971,-57.226 50.952,-55.245 v1(50.952,-53.696) 50.546,-53.289 48.93,-53.289 48.117,-52.476 47.269,-52.476 46.457,-53.289 46.228,-53.289 45.263,-54.254 v1(45.263,-55.804) 44.933,-55.804 ; v1@48.59,-59.906 ccw(c48.59,-59.446) 48.915,-59.771 ccw(c49.241,-60.096) v1@48.781,-60.096 ; v1@50.762,-53.696 ccw(c50.302,-53.696) 50.627,-53.37 ccw(c50.952,-53.045) v1@50.952,-53.505 ; v1@50.818,-53.83 cw(c50.492,-54.156) 50.952,-54.156 cw(c51.412,-54.156) v1@51.087,-53.83 ; 51.029,-37.534 ccw(c51.569,-37.534) v1@51.187,-37.916 ; 51.029,-36.921 ccw(c52.182,-36.921) v1@51.367,-37.737 ; v1@55.067,-59.334 56.566,-57.836 56.566,-57.277 58.903,-54.94 60.046,-54.94 60.884,-54.102 60.884,-52.31 R25.2@59.755,-51.181 ; v1@55.118,-59.093 ccw(c55.118,-58.633) 55.443,-58.958 ccw(c55.768,-59.284) v1@55.308,-59.284 ; R25.2@59.755,-51.504 cw(c59.755,-52.284) 60.306,-51.732 ; R25.2@60.028,-51.231 ccw(c60.566,-51.231) 60.186,-51.612 ; 44.425,-56.312 44.933,-55.804
  Bottom Layer w0.254: S10.1@31.674,-46.406 36.83,-46.406 37.694,-47.269 37.694,-54.381 ; S10.1@32.141,-46.773 cw(c33.027,-47.659) 33.027,-46.406 cw(c33.027,-45.153) S10.1@32.141,-46.039 ; S10.1@32.32,-46.952 cw(c33.64,-48.272) 33.64,-46.406 cw(c33.64,-44.54) S10.1@32.32,-45.859 ; v1@34.663,-46.541 ccw(c34.338,-46.866) 34.338,-46.406 ccw(c34.338,-45.946) v1@34.663,-46.271 ; v1@34.933,-46.541 cw(c35.258,-46.866) 35.258,-46.406 cw(c35.258,-45.946) v1@34.933,-46.271 ; S12.4@35.992,-54.788 37.287,-54.788 37.694,-54.381 ; S12.4@36.351,-55.147 cw(c37.218,-56.014) 37.218,-54.788 cw(c37.218,-53.561) S12.4@36.351,-54.429 ; v1@38.519,-55.728 ccw(c38.059,-55.728) 38.384,-55.402 ccw(c38.71,-55.077) v1@38.71,-55.537 ; v1@38.844,-55.862 cw(c39.17,-56.188) 39.17,-55.728 cw(c39.17,-55.268) v1@38.844,-55.593 ; C15.2@41.357,-46.019 ccw(c41.884,-45.492) C15.2@41.884,-46.237 ; v1@41.537,-45.839 ccw(c42.497,-44.879) 42.497,-46.237 ; C15.2@41.569,-46.203 41.605,-46.239 41.607,-46.237 43.145,-46.237 ; EC1.1@41.792,-64.803 cw(c42.127,-65.758) 42.842,-65.042 ; EC1.1@41.834,-64.922 42.723,-64.922 ; EC1.1@41.876,-65.042 cw(c42.275,-66.18) 43.128,-65.328 ; C15.2@41.914,-46.498 cw(c42.544,-47.128) 42.544,-46.237 ; C15.2@41.914,-46.112 ccw(c42.216,-45.81) 42.216,-46.237 ; EC1.1@41.96,-65.282 cw(c42.423,-66.603) 43.414,-65.613 ; EC1.1@42.044,-65.522 cw(c42.572,-67.026) C1.2@43.699,-65.899 ; 42.056,-55.601 cw(c42.056,-56.928) 42.994,-55.989 cw(c42.608,-56.376) 43.155,-56.376 ; EC1.1@42.434,-65.128 cw(c42.723,-65.227) 42.723,-64.922 ; EC1.1@42.434,-64.716 ccw(c42.723,-64.618) 42.723,-64.922 ; 42.669,-55.601 cw(c42.669,-56.315) v1@43.174,-55.81 ; v1@42.969,-62.527 ccw(c42.644,-62.202) 43.104,-62.202 ccw(c43.564,-62.202) v1@43.239,-62.527 ; 43.043,-65.243 ccw(c43.968,-64.317) C1.2@43.968,-65.626 ; v1(43.104,-62.662) 43.104,-61.417 42.875,-61.189 42.875,-60.122 43.155,-59.842 v1@43.155,-55.88 ; v1(43.129,-55.855) 42.875,-55.601 40.361,-55.601 40.234,-55.728 v1(38.71,-55.728) 37.694,-54.712 37.694,-54.381 ; 43.155,-56.253 cw(c43.528,-56.253) v1@43.264,-55.989 ; 43.477,-65.676 ccw(c43.968,-65.185) C1.2@43.968,-65.88 ; C1.2@44.261,-66.092 cw(c44.727,-66.558) 44.727,-65.899 cw(c44.727,-65.24) C1.2@44.261,-65.706 ; v1@44.29,-38.743 cw(c43.965,-39.068) 44.425,-39.068 cw(c44.885,-39.068) v1@44.559,-38.743 ; v1@44.29,-38.473 ccw(c43.965,-38.148) 44.425,-38.148 ccw(c44.885,-38.148) v1@44.559,-38.473 ; U5.48@44.438,-46.237 43.145,-46.237 ; S9.1@45.046,-32.447 cw(c43.727,-33.767) 45.593,-33.767 cw(c47.459,-33.767) S9.1@46.14,-32.447 ; 45.219,-65.703 cw(c45.559,-66.043) U1.2@45.868,-65.675 ; S9.1@45.226,-32.268 cw(c44.34,-33.154) 45.593,-33.154 cw(c46.846,-33.154) S9.1@45.96,-32.268 ; v1(45.263,-55.804) 46.021,-55.804 U5.32@46.263,-55.562 46.263,-56.125 45.807,-56.58 C17.2@45.807,-57.785 ; 45.278,-65.644 ccw(c44.912,-65.278) U1.2@45.43,-65.278 ; v1@45.398,-55.939 cw(c45.723,-56.264) 45.723,-55.804 cw(c45.723,-55.344) v1@45.398,-55.669 ; S9.1@45.593,-31.648 45.593,-36.093 44.425,-37.262 v1(44.425,-38.608) 44.425,-44.958 43.145,-46.237 ; C17.2@45.614,-57.542 ccw(c45.148,-57.076) 45.807,-57.076 ccw(c46.466,-57.076) C17.2@46,-57.542 ; 45.624,-55.804 ccw(c45.624,-54.923) U5.32@46.246,-55.546 ; U1.2@45.705,-65.869 ccw(c45.38,-66.256) 45.023,-65.899 ; 46.031,-56.356 cw(c46.263,-56.587) U5.32@46.263,-56.26 ; U1.2@46.203,-65.278 45.644,-65.278 45.023,-65.899 ; R19.2@50.799,-40.981 ccw(c50.333,-40.515) 50.992,-40.515 ccw(c51.651,-40.515) R19.2@51.185,-40.981 ; v1(50.952,-53.696) 51.566,-53.696 52.226,-54.356 52.613,-54.356 52.763,-54.506 U5.19@52.763,-55.562 52.763,-56.75 53.275,-57.263 C16.2@53.275,-57.988 53.275,-58.558 ; R19.2@50.992,-41.224 50.992,-39.94 EC7.1@52.095,-38.837 ; v1@51.087,-53.83 cw(c51.412,-54.156) 51.412,-53.696 cw(c51.412,-53.236) v1@51.087,-53.561 ; v1@51.182,-38.055 cw(c51.108,-38.332) EC7.1@51.356,-38.189 ; v1(51.232,-37.871) v1@51.232,-37.973 ; v1@51.409,-37.941 ccw(c51.831,-38.105) EC7.1@51.439,-38.332 ; v1@51.421,-37.852 ccw(c51.901,-37.802) EC7.1@51.66,-38.22 ; v1@51.422,-37.871 ccw(c52.127,-37.871) EC7.1@51.629,-38.37 ; EC7.1@51.46,-38.837 cw(c49.927,-38.837) 51.011,-39.921 cw(c52.095,-41.005) 52.095,-39.472 cw(c52.095,-41.005) 53.179,-39.921 cw(c54.263,-38.837) EC7.1@52.73,-38.837 ; EC7.1@51.47,-38.727 ccw(c50.626,-38.579) v1@51.232,-37.973 ; EC7.1@51.714,-38.837 cw(c50.795,-38.837) 51.445,-39.487 cw(c52.095,-40.137) 52.095,-39.218 cw(c52.095,-40.137) 52.746,-39.487 cw(c53.396,-38.837) EC7.1@52.476,-38.837 ; EC7.1@51.986,-38.211 cw(c51.838,-37.367) v1@51.232,-37.973 ; C16.2@53.04,-58.038 ccw(c53.728,-58.038) 53.242,-58.525 ; C16.2@53.082,-57.745 ccw(c52.616,-57.279) 53.275,-57.279 ccw(c53.934,-57.279) C16.2@53.468,-57.745 ; C16.2@53.12,-58.263 cw(c52.916,-58.558) 53.275,-58.558 ; C16.2@53.294,-58.038 ccw(c54.595,-58.038) 53.675,-58.958 ; C16.2@53.43,-58.263 ccw(c53.634,-58.558) 53.275,-58.558 ; C14.2@53.466,-41.467 cw(c53.065,-41.868) 53.632,-41.868 ; C14.2@53.466,-40.981 ccw(c53,-40.515) 53.659,-40.515 ccw(c54.318,-40.515) C14.2@53.852,-40.981 ; C16.2@53.548,-58.038 ccw(c55.462,-58.038) 54.109,-59.392 ; 53.632,-41.998 cw(c54.383,-41.998) C14.2@53.852,-41.467 ; C14.2@53.669,-41.158 ccw(c53.872,-40.819) 54.151,-41.099 ; U5.64@53.763,-44.412 53.763,-42.72 53.632,-42.589 53.632,-41.251 C14.2@53.659,-41.224 ; C14.2@53.8,-40.94 ccw(c54.045,-40.532) 54.381,-40.869 ; 54.229,-59.461 ccw(c54.229,-58.394) v1@54.983,-59.149 ; 54.842,-59.461 ccw(c54.842,-59.008) v1@55.163,-59.329 ; R22.2@54.911,-41.062 ccw(c54.445,-41.528) 54.445,-40.869 ccw(c54.445,-40.21) R22.2@54.911,-40.676 ; R22.2@55.104,-40.869 54.381,-40.869 ; v1(55.118,-59.284) 54.94,-59.461 54.178,-59.461 53.275,-58.558 ; 42.723,-64.922 C1.2@43.699,-65.899 ; C1.2@43.699,-65.899 C1.2@44.018,-65.899 45.023,-65.899 ; v1@51.232,-37.973 EC7.1@52.095,-38.837 ; EC7.1@52.095,-38.837 53.659,-40.4 C14.2@53.659,-41.224 ; C14.2@53.659,-41.224 54.026,-41.224 54.381,-40.869
pads on no net: U2.2 U2.3 U2.4 U2.5 U2.6 U2.7 U2.14 U2.15 U2.16 U2.17 U2.19 U2.21 U2.22 U3.4 U4.4 X1.3

## Polygon pours and split planes (outlines as drawn)
GND on Bottom Layer "Top Layer-No Net" (solid, remove dead copper, pour order 2): -0.305,0.254 100.203,0.254 100.228,0.279 100.228,-100.178 100.305,-100.254 -0.203,-100.254 -0.229,-100.279
GND on Top Layer "Top Layer-No Net" (solid, remove dead copper, pour order 4): -0.305,-100.355 -0.051,-100.101 100.228,-100.101 100.228,0.152 100.178,0.203 -0.279,0.203

## Keep-outs
Keep-Out Layer:
  lines w0.254: 3.557,-15.111 cw(c8.3,-8.3) 15.454,-4.091 ; 3.56,-15.107 25.473,-29.936 ; 3.704,-84.788 ccw(c8.3,-91.7) 14.988,-96.615 ; 3.706,-84.791 25.544,-70.015 ; 14.981,-96.609 29.829,-74.683 ; 15.451,-4.093 30.434,-26.213 ; 25.472,-29.937 cw(c19.777,-38.43) 30.003,-38.456 ; 25.542,-70.012 ccw(c19.771,-61.57) 29.997,-61.544 ; 29.833,-74.685 cw(c38.43,-80.223) 38.579,-69.998 ; 30,-61.544 30,-38.456 ; 30.433,-26.188 ccw(c38.379,-19.752) 38.747,-29.971 ; 38.557,-70 61.544,-70 ; 38.747,-29.975 61.514,-29.975 ; 61.514,-29.972 ccw(c61.57,-19.746) 69.991,-25.548 ; 61.544,-70.003 cw(c61.58,-80.229) 70.168,-74.678 84.587,-95.964 ; 69.999,-25.569 84.831,-3.651 ; 70,-38.582 70,-61.595 ccw(c80.227,-61.565) 74.446,-70 ; 70.004,-38.582 cw(c80.229,-38.43) 74.663,-29.851 ; 74.444,-70.003 96.391,-84.838 ; 74.66,-29.846 96.16,-15.298 ; 84.581,-95.968 ccw(c91.7,-91.7) 96.385,-84.848 ; 84.941,-3.482 cw(c91.7,-8.3) 96.161,-15.299

## Silkscreen, mask and mechanical layers (free items; w line width, h text height)
Top Overlay:
  lines w0.1: 33.198,-40.488 34.366,-40.488 35.001,-39.853 ; 34.722,-39.853 35.001,-39.853 ; 35.001,-40.183 35.001,-39.853
  lines w0.254: 8.893,-1.959 8.893,-1.828 8.893,-1.724
  lines w0.5: 8.893,-1.959 9.754,-2.819 ; 8.893,-1.828 cw(c9.055,-8.287) 15.418,-7.163 ; 8.893,-1.724 9.677,-0.94 ; 10.033,-99.187 8.895,-98.049 8.874,-98.049 ; 10.084,-96.825 8.874,-98.035 8.874,-98.049 ; 14.819,-90.284 cw(c8.493,-91.599) 8.874,-98.049 ; 85.095,-9.21 cw(c91.474,-8.184) 91.107,-1.733 ; 85.288,-90.385 ccw(c91.639,-91.571) 90.932,-97.993 90.907,-97.993 ; 89.738,-99.162 90.907,-97.993 ; 89.764,-96.85 90.907,-97.993 ; 90.119,-0.737 91.082,-1.699 91.107,-1.699 91.107,-1.733 ; 90.17,-2.769 91.107,-1.831 91.107,-1.733
  text "+" at 36.652,-45.872 h1.52 r90
  text "PA11" at 42.088,-45.923 h1 r90
  text "PA12" at 39.776,-45.974 h1 r90
  text "GNDD" at 37.668,-46.126 h1 r90
  text "RX" at 34.646,-48.997 h1
  text "PB15" at 37.059,-50.114 h1
  text "TX" at 34.468,-51.765 h1
  text "PB14" at 37.084,-52.756 h1
  text "-" at 35.712,-53.899 h1.52 r90
  text "PB13" at 37.109,-55.321 h1
  text "USART1" at 30.836,-56.032 h2 r270
  text "PB12" at 37.084,-57.633 h1
  text "GNDD" at 37.135,-59.893 h1
  text "VCCD" at 37.135,-62.154 h1
  text "CSn" at 42.621,-62.662 h1
  text "MOSI" at 40.919,-64.668 h1
  text "MISO" at 39.192,-66.294 h1
  text "SCK" at 37.668,-68.123 h1
Bottom Overlay:
  lines w0.1: 57.379,-42.215 57.201,-42.037 57.201,-41.986 ; 57.379,-41.808 57.201,-41.986 ; 58.115,-40.996 58.115,-41.554 57.683,-41.986 57.201,-41.986
  text "M1" at 18.974,-13.233 h8 r45
  text "M2" at 86.131,-19.66 h8 r315
  text "SW串行调试" at 64.922,-32.766 h2
  text "DIO" at 48.514,-34.036 h1 r90
  text "CLK" at 51.156,-34.138 h1 r90
  text "+" at 44.958,-36.093 h1.52
  text "-" at 52.807,-36.271 h1.52
  text "Bat+" at 69.012,-47.295 h1.52
  text "Bat-" at 69.012,-51.054 h1.52
  text "-" at 64.16,-52.857 h4 r180
  text "VCCD" at 35.027,-55.296 h1
  text "+" at 64.414,-57.175 h3 r90
  text "GNDD" at 34.671,-57.353 h1
  text "PB11" at 34.696,-59.538 h1
  text "PB10" at 34.773,-62.027 h1
  text "V1.12" at 66.571,-62.103 h2.03
  text "IRQ" at 54.811,-63.828 h1
  text "MOSI" at 52.324,-63.906 h1
  text "VCC" at 47.142,-63.957 h1
  text "CSn" at 49.378,-64.008 h1
  text "20150827" at 66.575,-65.024 h2.03
  text "By 蓝色枫叶" at 66.573,-68.428 h2.03
  text "CE" at 49.225,-69.647 h1
  text "MISO" at 54.991,-69.647 h1
  text "GND" at 47.219,-69.672 h1
  text "SCK" at 52.045,-69.672 h1
  text "M4" at 14.554,-79.35 h8 r135
  text "M3" at 80.366,-86.868 h8 r225